# Allegro board 正点原子&野火LCD FPC转接板.brd
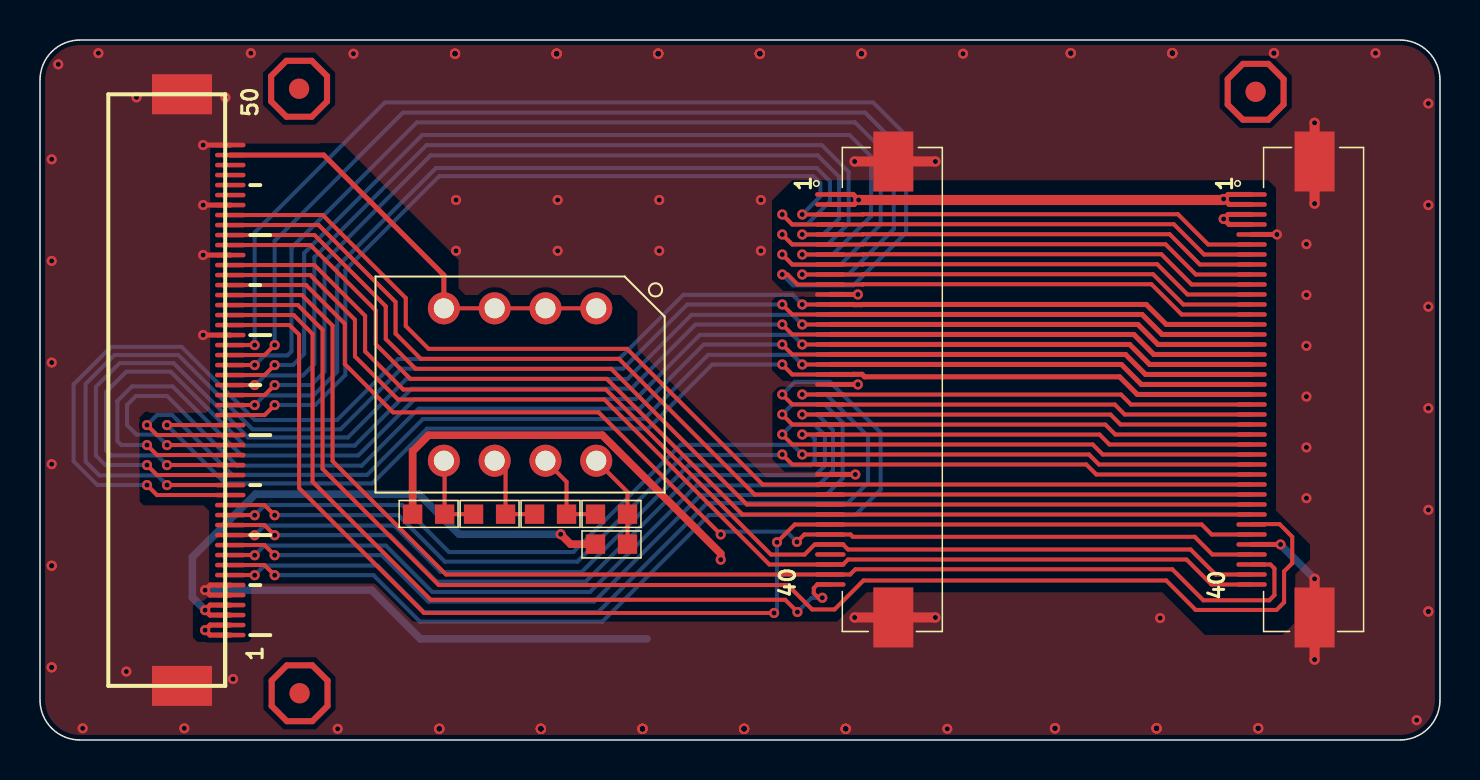
[diagram p0: board, top side]
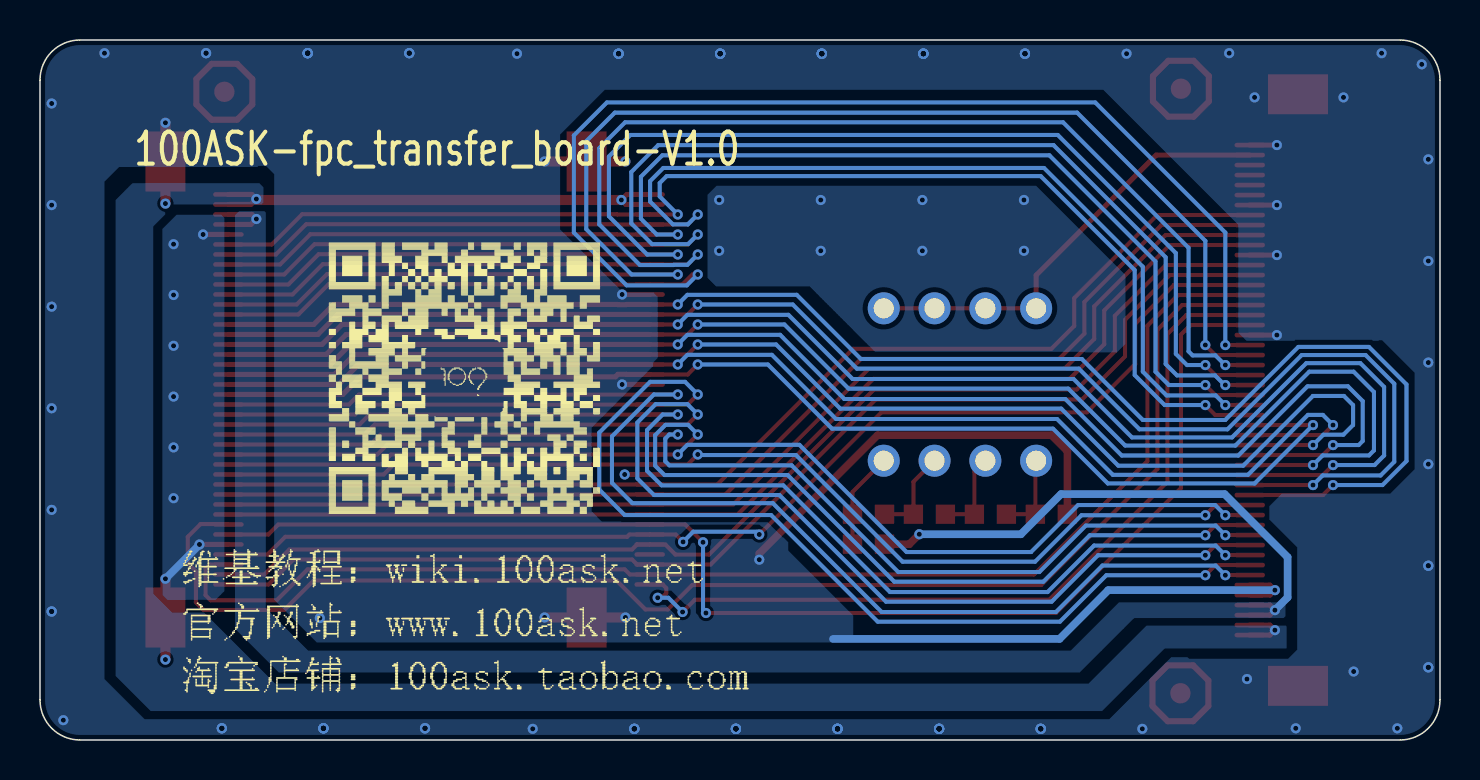
[diagram p1: board, bottom side, seen from below]

Outline 70 x 35 mm; copper layers: TOP, BOTTOM. Coordinates in mm from the lower left corner of the outline.
Outline path: 0,33 0,2 arc(0.59,0.59) 2,0 68,0 arc(69.41,0.59) 70,2 70,33 arc(69.41,34.41) 68,35 2,35 arc(0.59,34.41) 0,33

## Placement (name value [footprint] x y rotation side)
J1  LCD_FPC_50P  [FPC50_0A5_SM_H1]  9.51 29.75 90 top
J2  LCD_FPC_40P_A  [FPC40_0A5_SM_H]  39.52 17.53 90 top
J3  LCD_FPC_40P_F  [FPC40_0A5_SM_H]  60.58 17.53 90 top
NOREF  -  [unnamed]  12.95 32.56 0 top
NOREF#2  -  [unnamed]  60.78 32.41 0 top
NOREF#3  -  [unnamed]  12.98 2.34 0 top
R1  1K  [R0603]  28.57 9.79 180 top
R2  1K  [R0603]  28.57 11.29 0 top
R3  1K  [R0603]  25.53 11.29 0 top
R4  1K  [R0603]  22.48 11.29 0 top
R5  1K  [R0603]  19.43 11.29 0 top
SW1  218-4LPSTR  [SW2X4_2A54_10A8X14A5]  24 17.77 180 top

## Library data of the parts
J1 = LCD_FPC_0
J2 = LCD_FPC_40P_A_0
J3 = LCD_FPC_40P_F_0
R1-R5 = R1_0805
SW1 = SWITCH-4_0

## Footprints (pads in the part's own frame, mm; a bottom-side part is the same pattern mirrored in y, then rotated)
FPC40_0A5_SM_H
  oval 0.229x1.524 smd: 1(9.75,0) 2(9.25,0) 3(8.75,0) 4(8.25,0) 5(7.75,0) 6(7.25,0) 7(6.75,0) 8(6.25,0) 9(5.75,0) 10(5.25,0) 11(4.75,0) 12(4.25,0) 13(3.75,0) 14(3.25,0) 15(2.75,0) 16(2.25,0) 17(1.75,0) 18(1.25,0) 19(0.75,0) 20(0.25,0) 21(-0.25,0) 22(-0.75,0) 23(-1.25,0) 24(-1.75,0) 25(-2.25,0) 26(-2.75,0) 27(-3.25,0) 28(-3.75,0) 29(-4.25,0) 30(-4.75,0) 31(-5.25,0) 32(-5.75,0) 33(-6.25,0) 34(-6.75,0) 35(-7.25,0) 36(-7.75,0) 37(-8.25,0) 38(-8.75,0) 39(-9.25,0) 40(-9.75,0)
  rect 3x2 smd: 41(-11.4,-3.15) 42(11.4,-3.15)
FPC50_0A5_SM_H1
  oval 0.229x1.524 smd: 1(-24.5,0) 2(-24,0) 3(-23.5,0) 4(-23,0) 5(-22.5,0) 6(-22,0) 7(-21.5,0) 8(-21,0) 9(-20.5,0) 10(-20,0) 11(-19.5,0) 12(-19,0) 13(-18.5,0) 14(-18,0) 15(-17.5,0) 16(-17,0) 17(-16.5,0) 18(-16,0) 19(-15.5,0) 20(-15,0) 21(-14.5,0) 22(-14,0) 23(-13.5,0) 24(-13,0) 25(-12.5,0) 26(-12,0) 27(-11.5,0) 28(-11,0) 29(-10.5,0) 30(-10,0) 31(-9.5,0) 32(-9,0) 33(-8.5,0) 34(-8,0) 35(-7.5,0) 36(-7,0) 37(-6.5,0) 38(-6,0) 39(-5.5,0) 40(-5,0) 41(-4.5,0) 42(-4,0) 43(-3.5,0) 44(-3,0) 45(-2.5,0) 46(-2,0) 47(-1.5,0) 48(-1,0) 49(-0.5,0) 50(0,0)
  rect 2x3 smd: 51(-27.04,2.413) 52(2.54,2.413)
R0603
  rect 0.965x0.965 smd: 1(-0.8,0) 2(0.8,0)
SW2X4_2A54_10A8X14A5
  round 1.6 hole 1: 1(-3.81,-3.81) 2(-1.27,-3.81) 3(1.27,-3.81) 4(3.81,-3.81) 5(3.81,3.81) 6(1.27,3.81) 7(-1.27,3.81) 8(-3.81,3.81)
unnamed
  round 1.016 smd: 1(0,0)

## Nets
3V3: J1.3(3V3#3) J1.4(3V3#4) J3.3(3V3#3) J3.4(3V3#4) R1.2
5V: J1.1(5V#1) J1.2(5V#2) J2.1(5V#1) J2.2(5V#2) J3.1(5V#1) J3.2(5V#2)
GND_POWER: J1.5(GND#5) J1.6(GND#6) J1.31(GND#31) J1.39(GND#39) J1.44(GND#44) J1.50(GND#50) J1.51(GND#51) J1.52(GND#52) J2.11(GND#11) J2.20(GND#20) J2.29(GND#29) J2.41(GND#41) J2.42(GND#42) J3.5(GND#5) J3.36(GND#36) J3.41(GND#41) J3.42(GND#42) R5.1
B0: J1.7(B0) J2.21(B0) J3.22(B0)
B1: J1.8(B1) J2.22(B1) J3.23(B1)
B2: J1.9(B2) J2.23(B2) J3.24(B2)
B3: J1.10(B3) J2.24(B3) J3.25(B3)
B4: J1.11(B4) J2.25(B4) J3.26(B4)
B5: J1.12(B5) J2.26(B5) J3.27(B5)
B6: J1.13(B6) J2.27(B6) J3.28(B6)
B7: J1.14(B7) J2.28(B7) J3.29(B7)
BL_CN: J1.32(BL_CN) J2.34(BL) J3.35(BK)
DE: J1.40(DEN) J2.33(DE) J3.33(DE)
DISP: J1.34(DISP) J3.34(DISP)
G0: J1.15(G0) J2.12(G0) J3.14(G0)
G1: J1.16(G1) J2.13(G1) J3.15(G1)
G2: J1.17(G2) J2.14(G2) J3.16(G2)
G3: J1.18(G3) J2.15(G3) J3.17(G3)
G4: J1.19(G4) J2.16(G4) J3.18(G4)
G5: J1.20(G5) J2.17(G5) J3.19(G5)
G6: J1.21(G6) J2.18(G6) J3.20(G6)
G7: J1.22(G7) J2.19(G7) J3.21(G7)
HS: J1.42(HSYNC) J2.31(HSYNC) J3.31(HS)
LCD_ID: J1.49(LR/ADC_LCD_ID) SW1.1(ON1) SW1.2(ON2) SW1.3(ON3) SW1.4(ON4)
PCLK: J1.43(PCLK) J2.30(CLK) J3.30(CLK)
R0: J1.23(R0) J2.3(R0) J3.6(R0)
R1: J1.24(R1) J2.4(R1) J3.7(R1)
R2: J1.25(R2) J2.5(R2) J3.8(R2)
R3: J1.26(R3) J2.6(R3) J3.9(R3)
R4: J1.27(R4) J2.7(R4) J3.10(R4)
R5: J1.28(R5) J2.8(R5) J3.11(R5)
R6: J1.29(R6) J2.9(R6) J3.12(R6)
R7: J1.30(R7) J2.10(R7) J3.13(R7)
RST: J1.33(RESET) J2.40(RESET)
TP_INT: J1.35(TP_INTN) J2.39(TP_INT) J3.38(TP_INT)
TP_RST: J1.36(TP_RESET) J2.35(TP_RST) J3.37(TP_RST)
TP_SCL: J1.37(TP_SCL) J2.38(TP_SCL) J3.40(TP_SCL)
TP_SDA: J1.38(TP_SDA) J2.36(TP_SDA) J3.39(TP_SDA)
VS: J1.41(VSYNC) J2.32(VSYNC) J3.32(VS)
N16654617: R1.1 R2.2 SW1.8(OFF1)
N16654621: R2.1 R3.2 SW1.7(OFF2)
N16654625: R3.1 R4.2 SW1.6(OFF3)
N16654629: R4.1 R5.2 SW1.5(OFF4)

Pads without a net: J1 45 46 47 48; J2 37; NOREF 1; NOREF#2 1; NOREF#3 1

## Via types
v1: diameter 0.508, hole 0.254, TOP to BOTTOM, 215 vias

## Routing (per net, layer and track width the routed paths; a pad name or vN(x,y) marks a point on that pad's centre or on a via; arc(x,y) is an arc through that point)
3V3: length 31.1
  TOP w0.254: J3.4 59.46,25.78 v1(59.18,26.05) 59.41,26.28 J3.3 ; J1.4 8.51,6.75 v1(8.26,6.49) 8.5,6.25 J1.3
  TOP w0.381: R1.2 26.53,9.79 v1(26.04,10.29)
  BOTTOM w0.381: v1(26.04,10.29) 20.95,10.29 18.95,12.29 10.77,12.29 7.62,9.14 7.62,7.13 v1(8.26,6.49)
5V: length 27
  TOP w0.254: J3.2 59.46,26.78 v1(59.18,27.05) 59.41,27.28 J3.1 ; J1.1 8.5,5.25 v1(8.26,5.49) 8.51,5.75 J1.2 ; J2.2 40.71,26.78 v1(40.93,27) 40.66,27.28 J2.1
  TOP w0.508: v1(59.18,27.05) 59.13,27 v1(40.93,27)
GND_POWER: length 78.2
  TOP w0.254: J2.11 v1(40.89,22.28) ; J3.36 v1(62.03,9.78) ; J1.44 v1(8.16,26.75) ; J1.6 8.51,7.75 v1(8.26,7.49) 8.5,7.25 J1.5 ; J1.50 v1(8.16,29.75) ; J3.5 v1(61.85,25.28) ; J2.29 v1(40.77,13.28) ; J2.20 v1(40.89,17.78) ; J1.39 v1(8.16,24.25) ; J1.31 v1(8.16,20.25)
  TOP w0.381: R5.1 18.63,14.44 19.43,15.24 28.12,15.24 34.04,9.32 v1(34.04,9.02)
  TOP w0.508: v1(44.77,6.13) J2.41 v1(40.73,6.13) ; v1(63.73,26.82) J3.42 v1(63.73,30.86) ; v1(63.73,8.06) J3.41 v1(63.73,4.02) ; v1(44.77,28.93) J2.42 v1(40.73,28.93)
  BOTTOM w0.381: v1(8.26,7.49) 16.59,7.49 19.02,5.05 30.35,5.05 ; v1(63.73,8.06) 62.03,9.76 v1(62.03,9.78)
  vias: v1(0.58,29.03) v1(0.58,23.95) v1(0.58,18.87) v1(0.58,13.79) v1(0.58,8.71) v1(0.58,8.71) v1(0.58,3.63) v1(0.58,3.63) v1(0.91,33.78) v1(2.13,0.58) v1(2.92,34.34) v1(4.32,3.42) v1(4.83,32.13) v1(7.21,0.58) v1(9.27,32.13) v1(9.65,3.05) v1(10.54,34.34) v1(14.88,0.56) v1(15.67,34.32) v1(19.96,0.56) v1(19.96,0.56) v1(19.96,0.56) v1(19.96,0.56) v1(19.96,0.56) v1(20.75,34.32) v1(20.75,34.32) v1(20.75,34.32) v1(20.75,34.32) v1(20.75,34.32) v1(20.8,27) v1(20.8,24.46) v1(25.04,0.56) v1(25.04,0.56) v1(25.04,0.56) v1(25.04,0.56) v1(25.04,0.56) v1(25.04,0.56) v1(25.04,0.56) v1(25.04,0.56) v1(25.83,34.32) v1(25.83,34.32) v1(25.83,34.32) v1(25.83,34.32) v1(25.83,34.32) v1(25.83,34.32) v1(25.83,34.32) v1(25.83,34.32) v1(25.88,27) v1(25.88,24.46) v1(30.12,0.56) v1(30.12,0.56) v1(30.12,0.56) v1(30.12,0.56) v1(30.12,0.56) v1(30.12,0.56) v1(30.12,0.56) v1(30.12,0.56) v1(30.91,34.32) v1(30.91,34.32) v1(30.91,34.32) v1(30.91,34.32) v1(30.91,34.32) v1(30.91,34.32) v1(30.91,34.32) v1(30.91,34.32) v1(30.96,27) v1(30.96,24.46) v1(35.2,0.56) v1(35.2,0.56) v1(35.2,0.56) v1(35.2,0.56) v1(35.2,0.56) v1(35.2,0.56) v1(35.2,0.56) v1(35.2,0.56) v1(35.99,34.32) v1(35.99,34.32) v1(35.99,34.32) v1(35.99,34.32) v1(35.99,34.32) v1(35.99,34.32) v1(35.99,34.32) v1(35.99,34.32) v1(36.04,27) v1(36.04,24.46) v1(40.28,0.56) v1(40.28,0.56) v1(40.28,0.56) v1(40.28,0.56) v1(40.28,0.56) v1(41.07,34.32) v1(41.07,34.32) v1(41.07,34.32) v1(41.07,34.32) v1(41.07,34.32) v1(45.36,0.56) v1(46.15,34.32) v1(50.75,0.58) v1(50.75,0.58) v1(50.75,0.58) v1(51.54,34.34) v1(51.54,34.34) v1(51.54,34.34) v1(55.83,0.58) v1(55.83,0.58) v1(55.83,0.58) v1(55.83,0.58) v1(55.83,0.58) v1(55.83,0.58) v1(56.01,6.1) v1(56.62,34.34) v1(56.62,34.34) v1(56.62,34.34) v1(56.62,34.34) v1(56.62,34.34) v1(56.62,34.34) v1(60.91,0.58) v1(60.91,0.58) v1(60.91,0.58) v1(61.7,34.34) v1(61.7,34.34) v1(63.32,24.79) v1(63.32,22.25) v1(63.32,19.71) v1(63.32,17.17) v1(63.32,14.63) v1(63.32,12.09) v1(66.78,34.34) v1(68.83,0.99) v1(69.42,31.83) v1(69.42,26.75) v1(69.42,21.67) v1(69.42,16.59) v1(69.42,11.51) v1(69.42,6.43) v1(69.42,6.43)
B0: length 64.9
  TOP w0.203: v1(38.11,17.28) J2.21 39.52,17.27 54.05,17.27 54.55,16.78 J3.22 ; v1(10.73,8.24) 10.73,8.25 J1.7
  BOTTOM w0.203: v1(38.11,17.28) 39.31,17.28 41.4,15.18 41.4,12.86 40.39,11.84 33.36,11.84 27.91,6.4 19.2,6.4 16.88,8.72 11.22,8.72 v1(10.73,8.24)
B1: length 69.4
  TOP w0.203: v1(37.11,17.28) 37.61,16.78 J2.22 39.52,16.77 53.74,16.77 54.23,16.28 J3.23 ; v1(11.73,8.24) 11.23,8.75 J1.8
  BOTTOM w0.203: v1(37.11,17.28) 37.74,17.91 39.5,17.91 42.04,15.37 42.04,12.52 40.77,11.25 33.45,11.25 28.11,5.92 19,5.92 16.68,8.24 v1(11.73,8.24)
B2: length 60.4
  TOP w0.203: v1(10.73,9.24) 10.73,9.25 J1.9 ; v1(38.11,16.28) J2.23 39.52,16.27 53.53,16.27 54.02,15.78 J3.24
  BOTTOM w0.203: v1(38.11,16.28) 38.87,16.28 39.65,15.49 39.65,13.46 38.92,12.73 32.83,12.73 27.5,7.4 19.62,7.4 17.3,9.72 11.22,9.72 v1(10.73,9.24)
B3: length 64.6
  TOP w0.203: J3.25 53.76,15.28 53.27,15.77 39.52,15.77 J2.24 37.61,15.78 v1(37.11,16.28) ; J1.10 11.23,9.75 v1(11.73,9.24)
  BOTTOM w0.203: v1(11.73,9.24) 17.1,9.24 19.42,6.92 27.7,6.92 33.03,12.25 39.3,12.25 40.13,13.08 40.13,15.88 39.21,16.79 37.63,16.79 v1(37.11,16.28)
B4: length 57.2
  TOP w0.203: J3.26 53.47,14.78 52.98,15.27 39.52,15.27 J2.25 v1(38.11,15.28) ; v1(10.73,10.24) 10.73,10.25 J1.11
  BOTTOM w0.203: v1(38.11,15.28) 38.53,15.28 38.73,15.07 38.73,13.94 38.53,13.73 32.42,13.73 27.08,8.4 20.03,8.4 17.71,10.72 11.22,10.72 v1(10.73,10.24)
B5: length 61.3
  TOP w0.203: J1.12 11.23,10.75 v1(11.73,10.24) ; v1(37.11,15.28) 37.61,14.78 J2.26 52.64,14.78 53.14,14.28 J3.27
  BOTTOM w0.203: v1(37.11,15.28) 37.6,15.76 38.72,15.76 39.24,15.24 39.24,13.72 38.78,13.25 32.62,13.25 27.28,7.92 19.83,7.92 17.51,10.24 v1(11.73,10.24)
B6: length 54.9
  TOP w0.203: v1(10.73,11.24) 10.73,11.25 J1.13 ; v1(38.11,14.28) J2.27 52.45,14.28 52.95,13.78 J3.28
  BOTTOM w0.203: v1(38.11,14.28) 37.63,14.76 32.03,14.76 26.67,9.4 20.45,9.4 18.1,11.75 11.24,11.75 v1(10.73,11.24)
B7: length 54.9
  TOP w0.203: v1(37.11,14.28) 37.61,13.78 J2.28 52.31,13.78 52.81,13.28 J3.29 ; J1.14 11.23,11.75 v1(11.73,11.24)
  BOTTOM w0.203: v1(11.73,11.24) 17.92,11.24 20.25,8.92 26.87,8.92 32.2,14.25 37.09,14.25 v1(37.11,14.28)
BL_CN: length 65.5
  TOP w0.203: J3.35 58.58,10.28 58.08,10.78 J2.34 37.74,10.78 v1(36.85,9.89) ; J1.32 12.48,20.75 12.95,20.27 12.95,12.6 19.2,6.35 v1(36.7,6.35)
  BOTTOM w0.203: v1(36.85,9.89) 36.85,6.5 v1(36.7,6.35)
DE: length 57.6
  TOP w0.203: J1.40 13.52,24.75 16.79,21.48 16.79,19.79 18.52,18.06 28.34,18.06 35.12,11.28 J2.33 J3.33
DISP: length 70.2
  TOP w0.203: J1.34 12.89,21.75 14.13,20.51 14.13,13.56 19.94,7.75 37.39,7.75 38.61,6.53 39.73,6.53 41.17,7.98 56.31,7.98 57.78,6.5 61.82,6.5 62.2,6.88 62.2,8.43 62.61,8.84 62.61,10.16 61.98,10.79 60.6,10.79 J3.34
G0: length 76.8
  TOP w0.203: v1(5.35,12.75) 5.85,12.25 J1.15 ; J2.12 v1(38.11,21.78)
  TOP w0.254: J2.12 40.68,21.78 40.68,21.77 41.1,21.77 41.11,21.78 55.31,21.78 56.31,20.78 J3.14
  BOTTOM w0.203: v1(38.11,21.78) 37.63,22.26 32.16,22.26 28.96,19.05 17.91,19.05 14.86,16 10.73,16 7.08,19.65 3.55,19.65 1.68,17.78 1.68,13.94 2.87,12.75 v1(5.35,12.75)
G1: length 75.2
  TOP w0.203: J1.16 v1(6.35,12.75) ; v1(37.11,21.78) 37.61,21.28 J2.13
  TOP w0.254: J3.15 56.11,20.28 55.11,21.28 J2.13
  BOTTOM w0.203: v1(37.11,21.78) 32.36,21.78 29.16,18.57 18.06,18.57 15.03,15.54 10.63,15.54 6.91,19.25 3.72,19.25 2.29,17.81 2.29,13.91 2.97,13.23 5.87,13.23 v1(6.35,12.75)
G2: length 73.5
  TOP w0.203: J2.14 v1(38.11,20.78) ; v1(5.35,13.75) 5.85,13.25 J1.17
  TOP w0.254: J3.16 55.9,19.78 54.9,20.78 J2.14
  BOTTOM w0.203: v1(5.35,13.75) 3.27,13.75 2.79,14.22 2.79,17.65 3.98,18.84 6.69,18.84 10.4,15.13 15.4,15.13 18.32,18.05 29.37,18.05 32.58,21.26 37.63,21.26 v1(38.11,20.78)
G3: length 71.8
  TOP w0.203: J1.18 v1(6.35,13.75) ; v1(37.11,20.78) 37.61,20.28 J2.15
  TOP w0.254: J3.17 55.69,19.28 54.69,20.28 J2.15
  BOTTOM w0.203: v1(6.35,13.75) 5.87,14.23 3.55,14.23 3.3,14.48 3.3,17.4 4.32,18.41 6.54,18.41 10.23,14.72 15.74,14.72 18.58,17.57 29.57,17.57 32.78,20.78 v1(37.11,20.78)
G4: length 69.5
  TOP w0.203: v1(5.35,14.75) 5.85,14.25 J1.19 ; J2.16 v1(38.11,19.78)
  TOP w0.254: J2.16 54.48,19.78 55.48,18.78 J3.18
  BOTTOM w0.203: v1(5.35,14.75) 4.07,14.75 3.86,14.95 3.86,16.95 4.6,17.69 6.62,17.69 10.08,14.22 15.91,14.22 18.74,17.05 29.78,17.05 32.99,20.26 37.63,20.26 v1(38.11,19.78)
G5: length 67.6
  TOP w0.203: J2.17 37.61,19.28 v1(37.11,19.78) ; J1.20 v1(6.35,14.75)
  TOP w0.254: J3.19 55.28,18.28 54.28,19.28 J2.17
  BOTTOM w0.203: v1(6.35,14.75) 5.83,15.26 4.83,15.26 4.35,15.75 4.35,16.75 4.8,17.2 6.35,17.2 9.84,13.72 16.08,13.72 18.94,16.57 29.98,16.57 33.19,19.78 v1(37.11,19.78)
G6: length 64.2
  TOP w0.203: J2.18 v1(38.11,18.78) ; v1(5.35,15.75) 5.85,15.25 J1.21
  TOP w0.254: J2.18 54.07,18.78 55.07,17.78 J3.20
  BOTTOM w0.203: v1(5.35,15.75) 5.86,16.26 6.6,16.26 9.6,13.26 16.36,13.26 19.15,16.05 30.2,16.05 33.41,19.26 37.63,19.26 v1(38.11,18.78)
G7: length 61.7
  TOP w0.203: J2.19 37.61,18.28 v1(37.11,18.78) ; J1.22 v1(6.35,15.75)
  TOP w0.254: J3.21 54.86,17.28 53.98,18.16 41.23,18.16 41.1,18.28 40.68,18.28 40.68,18.28 J2.19
  BOTTOM w0.203: v1(6.35,15.75) 9.27,12.83 16.61,12.83 19.35,15.57 30.4,15.57 33.61,18.78 v1(37.11,18.78)
HS: length 57.6
  TOP w0.203: J1.42 13.93,25.75 17.78,21.9 17.78,20.32 19.04,19.06 28.95,19.06 35.73,12.28 J2.31 J3.31
LCD_ID: length 22.4
  TOP w0.203: SW1.1 SW1.2 SW1.3 SW1.4
  TOP w0.254: J1.49 14.19,29.25 20.19,23.24 SW1.4
PCLK: length 57.5
  TOP w0.203: J1.43 14.14,26.25 18.29,22.1 18.29,20.7 19.43,19.56 29.35,19.56 36.13,12.78 J2.30 J3.30
R0: length 62.7
  TOP w0.203: J1.23 11.23,16.25 v1(11.73,16.75) ; J3.6 58.41,24.78 56.9,26.29 41.15,26.29 41.13,26.28 J2.3 v1(38.11,26.28)
  BOTTOM w0.203: v1(11.73,16.75) 13.77,16.75 15.27,18.25 15.27,23.5 19.96,28.19 38.67,28.19 39.02,27.85 39.02,27.18 v1(38.11,26.28)
R1: length 66.6
  TOP w0.203: v1(37.11,26.28) 37.61,25.78 J2.4 41.13,25.78 41.15,25.79 56.69,25.79 58.2,24.28 J3.7 ; J1.24 v1(10.73,16.75)
  BOTTOM w0.203: v1(37.11,26.28) 37.61,25.78 38.35,25.78 39.5,26.92 39.5,27.94 38.84,28.6 19.8,28.6 14.86,23.66 14.86,18.41 13.67,17.23 11.22,17.23 v1(10.73,16.75)
R2: length 66.4
  TOP w0.203: v1(38.11,25.28) J2.5 41.13,25.28 41.15,25.29 56.48,25.29 57.99,23.78 J3.8 ; v1(11.73,17.75) 11.23,17.25 J1.25
  BOTTOM w0.203: v1(38.11,25.28) 39.16,25.28 39.95,26.07 39.95,28.16 38.88,29.24 19.53,29.24 14.22,23.93 14.22,18.41 13.56,17.75 v1(11.73,17.75)
R3: length 70.4
  TOP w0.203: J3.9 57.79,23.28 56.27,24.79 41.15,24.79 41.13,24.78 J2.6 37.61,24.78 v1(37.11,25.28) ; J1.26 v1(10.73,17.75)
  BOTTOM w0.203: v1(37.11,25.28) 37.6,24.79 39.4,24.79 40.44,25.83 40.44,28.4 39.09,29.74 19.32,29.74 13.72,24.14 13.72,18.8 13.15,18.23 11.24,18.23 10.76,17.75 v1(10.73,17.75)
R4: length 70.7
  TOP w0.203: J1.27 11.23,18.25 v1(11.73,18.75) ; J3.10 57.58,22.78 56.07,24.29 41.15,24.29 41.13,24.28 J2.7 v1(38.11,24.28)
  BOTTOM w0.203: v1(38.11,24.28) 39.64,24.28 41.55,26.19 41.55,29.18 40.48,30.25 19.11,30.25 13.21,24.35 13.21,19.3 12.65,18.75 v1(11.73,18.75)
R5: length 75.2
  TOP w0.203: J1.28 v1(10.73,18.75) ; v1(37.11,24.28) 37.61,23.78 J2.8 41.13,23.78 41.15,23.79 55.86,23.79 57.37,22.28 J3.11
  BOTTOM w0.203: v1(37.11,24.28) 37.63,23.76 38.31,23.76 38.32,23.75 40.01,23.75 42.04,25.78 42.04,29.59 40.74,30.89 18.85,30.89 12.57,24.61 12.57,19.43 12.37,19.23 11.23,19.23 10.75,18.75 v1(10.73,18.75)
R6: length 74.8
  TOP w0.203: J1.29 11.23,19.25 v1(11.73,19.75) ; v1(38.11,23.28) J2.9 41.13,23.28 41.15,23.29 55.65,23.29 57.17,21.78 J3.12
  BOTTOM w0.203: v1(11.73,19.75) 11.73,24.96 18.14,31.37 41.26,31.37 42.69,29.94 42.69,25.54 40.42,23.28 v1(38.11,23.28)
R7: length 79.5
  TOP w0.203: J3.13 57.08,21.28 55.57,22.79 41.15,22.79 41.13,22.78 J2.10 37.88,22.78 37.38,23.28 v1(37.11,23.28) ; J1.30 v1(10.73,19.75)
  BOTTOM w0.203: v1(37.11,23.28) 37.66,22.73 40.67,22.73 43.31,25.37 43.31,30.23 41.66,31.88 17.24,31.88 10.73,25.37 v1(10.73,19.75)
RST: length 42.1
  TOP w0.203: v1(39.12,7.11) 38.91,7.11 38.69,7.34 38.69,7.59 38.87,7.78 J2.40 ; J1.33 12.68,21.25 13.63,20.3 13.63,12.91 19.53,7.01 37.26,7.01 v1(37.87,6.4)
  BOTTOM w0.203: v1(39.12,7.11) 38.58,7.11 v1(37.87,6.4)
TP_INT: length 65.4
  TOP w0.203: J3.38 61.52,8.78 61.72,8.57 61.72,7.24 61.47,6.99 58.17,6.99 56.62,8.53 40.77,8.53 40.51,8.28 J2.39 20.3,8.28 14.63,13.95 14.63,20.71 13.1,22.25 J1.35
TP_RST: length 58.2
  TOP w0.203: J1.36 13.3,22.75 15.24,20.81 15.24,18.8 17.65,16.38 27.93,16.38 v1(34.04,10.28) ; J3.37 58.62,9.28 57.73,10.16 40.64,10.16 40.52,10.28 J2.35 38.22,10.28 v1(37.85,9.91)
  BOTTOM w0.203: v1(34.04,10.28) 34.17,10.41 37.34,10.41 v1(37.85,9.91)
TP_SCL: length 58.8
  TOP w0.203: J1.37 13.51,23.25 15.75,21.01 15.75,19.18 17.9,17.03 28.22,17.03 36.47,8.78 J2.38 40.15,8.78 40.4,9.03 57.32,9.03 58.57,7.78 J3.40
TP_SDA: length 58.9
  TOP w0.203: J3.39 58.78,8.28 57.53,9.53 40.4,9.53 40.15,9.78 J2.36 38.73,9.78 38.23,9.27 36.55,9.27 28.29,17.53 18.16,17.53 16.26,19.43 16.26,21.21 13.72,23.75 J1.38
VS: length 57.6
  TOP w0.203: J1.41 13.72,25.25 17.29,21.68 17.29,20.05 18.78,18.56 28.56,18.56 35.34,11.78 J2.32 J3.32
N16654617: length 4.8
  TOP w0.203: R1.1 R2.2 29.38,12.4 SW1.8
N16654621: length 4.6
  TOP w0.203: R2.1 R3.2 26.33,12.91 SW1.7
N16654625: length 4.3
  TOP w0.203: SW1.6 23.28,13.42 R4.2 R3.1
N16654629: length 4.1
  TOP w0.203: R4.1 R5.2 20.23,13.93 SW1.5

## Copper pours and planes (outline as drawn; the poured copper is in the pictures)
3V3 on BOTTOM: 7.82,6.88 16.05,6.88 18.47,4.47 56.59,4.47 58.71,6.59 58.71,26.38 58.78,26.44 60.05,26.44 60.25,26.24 60.25,5.56 58.06,3.38 18.01,3.38 15.29,6.1 7.82,6.1 7.72,6.2 7.72,6.78
5V on BOTTOM: 7.7,5.71 14.68,5.71 17.58,2.82 58.24,2.82 61.8,6.38 63.4,6.38 64.34,7.32 64.34,25.68 63.25,26.77 58.93,26.77 58.83,26.87 58.83,27.64 59.03,27.84 65.38,27.84 66.22,27 66.22,3.2 64.47,1.45 16.89,1.45 13.77,4.57 7.7,4.57 7.67,4.6 7.67,5.69
GND_POWER on TOP: 2,0.25 0.77,0.77 0.25,2 0.25,33 0.77,34.23 2,34.75 68,34.75 69.23,34.23 69.75,33 69.75,2 69.23,0.77 68,0.25 ; 4 cut-outs
GND_POWER on BOTTOM: 2,0.25 0.77,0.77 0.25,2 0.25,33 0.77,34.23 2,34.75 68,34.75 69.23,34.23 69.75,33 69.75,2 69.23,0.77 68,0.25 ; 1 cut-out
GND_POWER on BOTTOM: 60.93,26.26 63.17,26.26 63.88,25.55 63.88,7.26 63.63,7.01 61.21,7.01 60.78,7.44 60.78,26.11
GND_POWER on BOTTOM: 20.19,27.71 36.17,27.71 36.63,27.25 36.63,23.11 36.2,22.68 31.52,22.68 28.22,19.38 16.15,19.38 15.72,19.81 15.72,23.24

## Text on the board
Ref Des/Silkscreen Bottom: 100ASK-fpc_transfer_board-V1.0
Ref Des/Silkscreen Top: 40
NCLEGEND-1-2: FIGURE | SIZE | 10.0 | 39.37 | DRILL CHART: TOP to BOTTOM | ALL UNITS ARE IN MILS | PLATED | QTY | 215 | 8
